# EAGLE board breadboarder_minimizing (EAGLE 6.5.0)
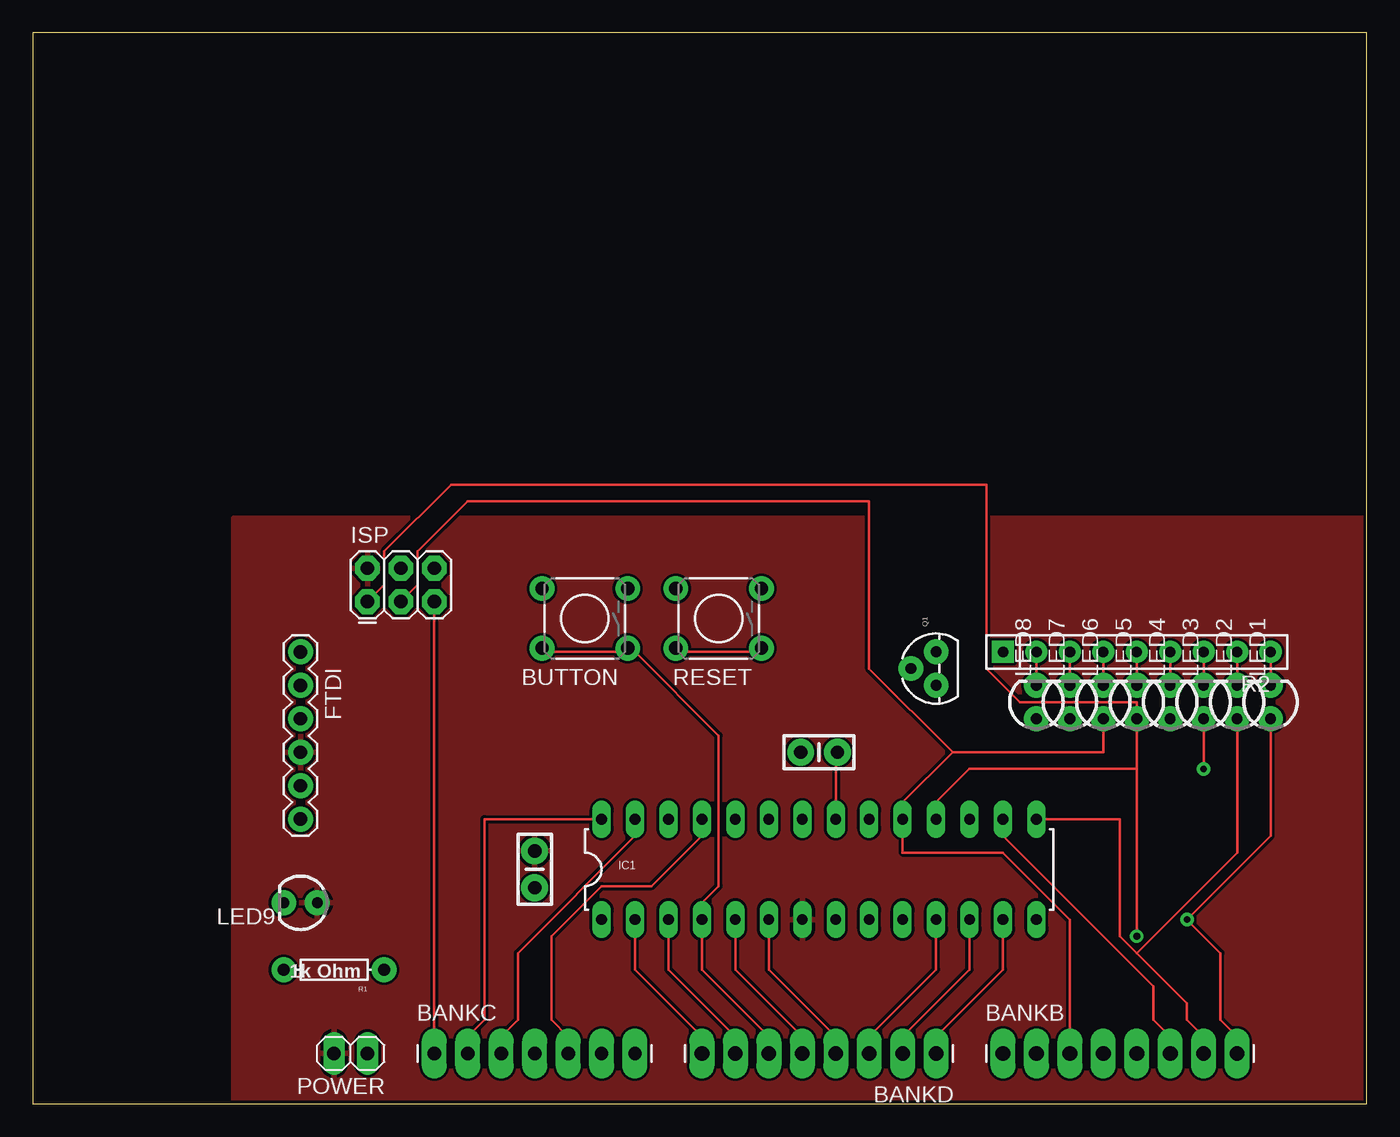
[diagram p0: board, top side]
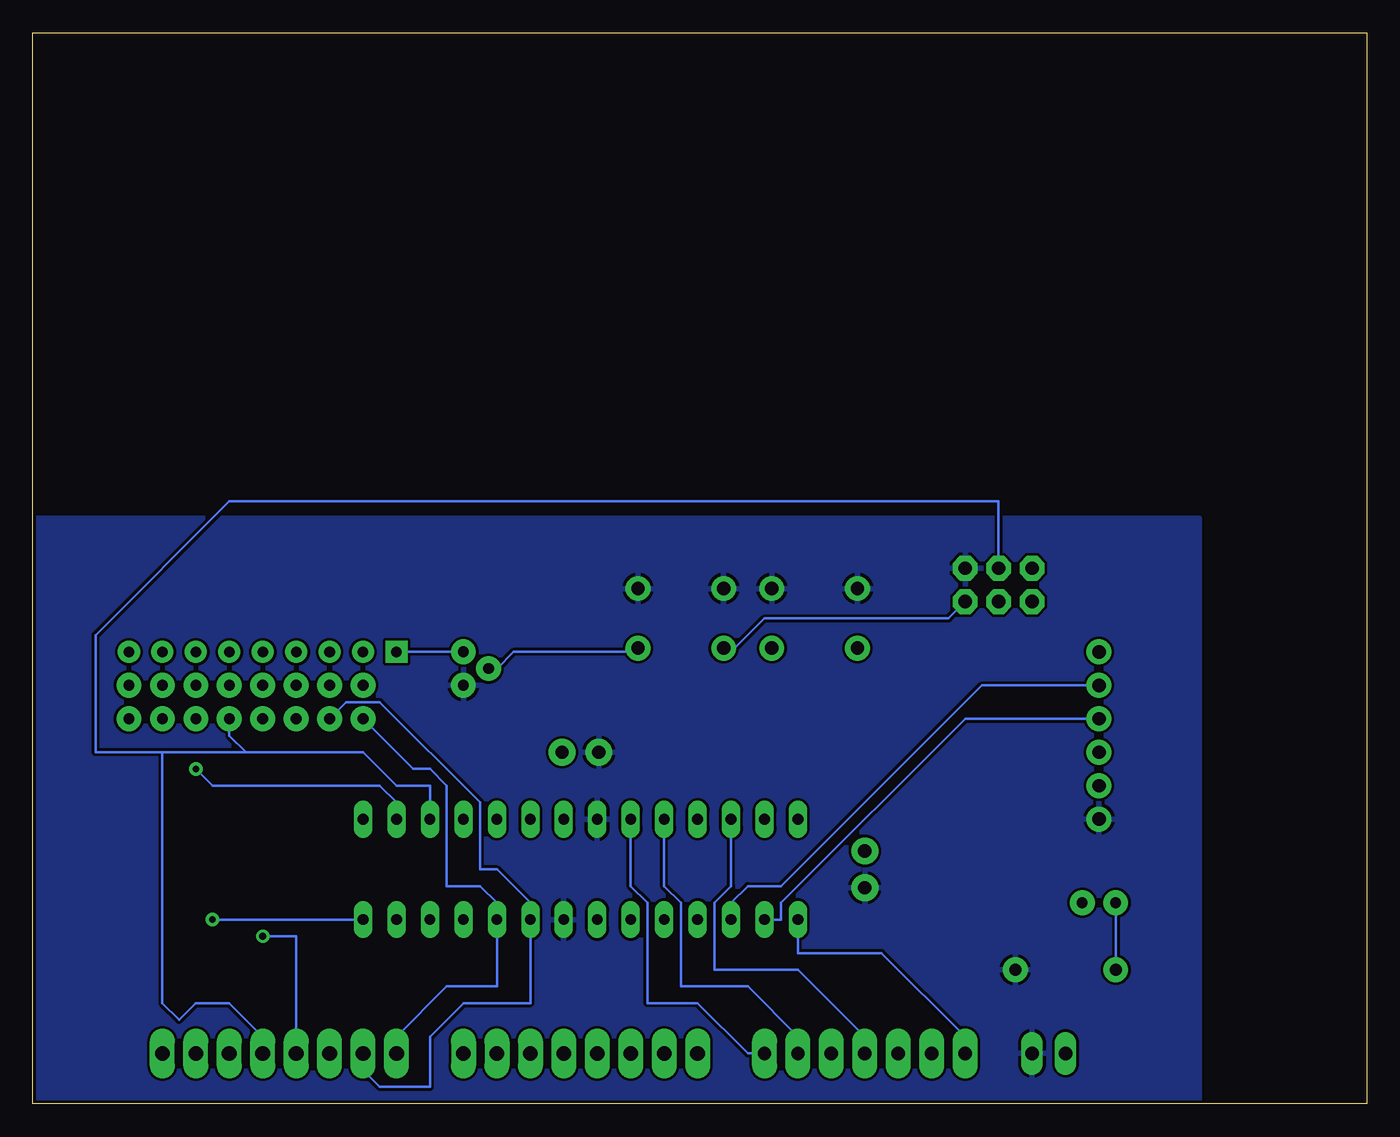
[diagram p1: board, bottom side, seen from below]

Size 101.27 x 81.27 mm. Coordinates in mm from the lower left corner, seen from the top.
Outline: 0,0 101.27,0 101.27,81.27 0,81.27 0,0
Copper layers (1*16): Top 0.035mm / dielectric 1.5mm / Bottom 0.035mm
Design rules "SparkFun": minimum track width 8mil, minimum drill 20mil, track to track 8mil, track to pad 8mil, pad to pad 8mil, via to via 8mil, smd to smd 8mil, copper to edge 10mil, drill to drill 8mil, minimum pad ring 12mil, minimum via ring 10mil, stop-mask expansion 4mil, vias tented up to drill 25mil, thermal gap 10mil

## Footprints (pad centres in the part's own frame; a part is rotated, then mirrored left to right if it is on the bottom)
1X08_LONGPADS = drill 1.118 pad 1.88 long: 1 0,0; 2 2.54,0; 3 5.08,0; 4 7.62,0; 5 10.16,0; 6 12.7,0; 7 15.24,0; 8 17.78,0
1X07_LONGPADS = drill 1.016 pad 1.88 long: 1 0,0; 2 2.54,0; 3 5.08,0; 4 7.62,0; 5 10.16,0; 6 12.7,0; 7 15.24,0
TACTILE-PTH = drill 1.016 pad 1.88: 1 -3.251,2.261; 2 3.251,2.261; 3 -3.251,-2.261; 4 3.251,-2.261
CAP-PTH-SMALL-KIT = drill 1.016 pad 2.032: 1 -1.397,0; 2 1.397,0
FTDI_BASIC = drill 1.016 pad 1.88: CTS 10.16,0; DTR 0,0; GND 12.7,0; RXI 2.54,0; TXO 5.08,0; VCC 7.62,0
DIL28-3 = drill 0.813 long: 1 -16.51,-3.81; 2 -13.97,-3.81; 3 -11.43,-3.81; 4 -8.89,-3.81; 5 -6.35,-3.81; 6 -3.81,-3.81; 7 -1.27,-3.81; 8 1.27,-3.81; 9 3.81,-3.81; 10 6.35,-3.81; 11 8.89,-3.81; 12 11.43,-3.81; 13 13.97,-3.81; 14 16.51,-3.81; 15 16.51,3.81; 16 13.97,3.81; 17 11.43,3.81; 18 8.89,3.81; 19 6.35,3.81; 20 3.81,3.81; 21 1.27,3.81; 22 -1.27,3.81; 23 -3.81,3.81; 24 -6.35,3.81; 25 -8.89,3.81; 26 -11.43,3.81; 27 -13.97,3.81; 28 -16.51,3.81
2X3 = drill 1.016 pad 1.88 octagon: 1 0,0; 2 0,2.54; 3 2.54,0; 4 2.54,2.54; 5 5.08,0; 6 5.08,2.54
LED3MM = drill 0.813 pad 1.88: A -1.27,0; K 1.27,0
1X02 = drill 1.016 long: 1 -1.27,0; 2 1.27,0
TO-92 = drill 0.813 pad 1.88: 1 -1.27,0; 2 0,1.905; 3 1.27,0
AXIAL-0.3 = drill 0.9 pad 1.88: P$1 -3.81,0; P$2 3.81,0
RPACK-SIP-PTH-8-LP = drill 0.8 pad 1.676 square: P$1 0,0 | drill 0.8 pad 1.676: P$2 0,-2.54; P$3 0,-5.08; P$4 0,-7.62; P$5 0,-10.16; P$6 0,-12.7; P$7 0,-15.24; P$8 0,-17.78; P$9 0,-20.32

## Placement (x,y rotation side)
BANKB  [1X08_LONGPADS]  73.66,3.81 0 top
BANKC  [1X07_LONGPADS]  30.48,3.81 0 top
BANKD  [1X08_LONGPADS]  68.58,3.81 180 top
BUTTON  [TACTILE-PTH]  41.91,36.83 180 top
C1  0.1uF  [CAP-PTH-SMALL-KIT]  38.1,17.78 270 top
C2  [CAP-PTH-SMALL-KIT]  59.69,26.67 180 top
FTDI  FTDI_BASICPTH  [FTDI_BASIC]  20.32,34.29 270 top
IC1  AVR-MEGA8-PPTH  [DIL28-3]  59.69,17.78 0 top
ISP  AVR_SPI_PRG_6PTH  [2X3]  25.4,38.1 0 top
LED1  [LED3MM]  93.98,30.48 90 top
LED2  [LED3MM]  91.44,30.48 90 top
LED3  [LED3MM]  88.9,30.48 90 top
LED4  [LED3MM]  86.36,30.48 90 top
LED5  [LED3MM]  83.82,30.48 90 top
LED6  [LED3MM]  81.28,30.48 90 top
LED7  [LED3MM]  78.74,30.48 90 top
LED8  [LED3MM]  76.2,30.48 90 top
LED9  [LED3MM]  20.32,15.24 180 top
POWER  [1X02]  24.13,3.81 180 top
Q1  MOSFET-NCHANNEL2N7000  [TO-92]  68.58,33.02 90 top
R1  1k Ohm  [AXIAL-0.3]  22.86,10.16 180 top
R2  [RPACK-SIP-PTH-8-LP]  73.66,34.29 90 top
RESET  [TACTILE-PTH]  52.07,36.83 180 top

## Library data of the parts
BANKB BANKC BANKD FTDI ISP = SparkFun-Connectors
BUTTON RESET = SparkFun-Electromechanical
C1 C2 = SparkFun-Capacitors
IC1 = SparkFun-DigitalIC
LED1-LED9 = SparkFun-LED
POWER = pinhead
Q1 = SparkFun-DiscreteSemi
R1 = SparkFun-Passives
R2 = SparkFun-Resistors

## Nets
AREF: C2.1 IC1.21
GND: BUTTON.3 BUTTON.4 C1.2 C2.2 FTDI.GND IC1.8 IC1.22 ISP.6 POWER.1 Q1.1 R1.P$1 RESET.3 RESET.4
N$1: Q1.3 R2.P$1
N$2: LED1.K R2.P$9
N$3: LED2.K R2.P$8
N$4: LED3.K R2.P$7
N$5: LED4.K R2.P$6
N$6: LED5.K R2.P$5
N$7: LED6.K R2.P$4
N$8: LED7.K R2.P$3
N$9: LED8.K R2.P$2
N$10: LED9.K R1.P$2
PB0: BANKB.8 IC1.14 LED1.A
PB1: BANKB.7 IC1.15 LED2.A
PB2: BANKB.6 IC1.16 LED3.A
PB3: BANKB.5 IC1.17 ISP.4 LED4.A
PB4: BANKB.4 IC1.18 ISP.1 LED5.A
PB5: BANKB.3 IC1.19 ISP.3 LED6.A
PB6: BANKB.2 IC1.9 LED7.A
PB7: BANKB.1 IC1.10 LED8.A
PC0: BANKC.7 IC1.23
PC1: BANKC.6 IC1.24
PC2: BANKC.5 IC1.25
PC3: BANKC.4 IC1.26
PC4: BANKC.3 IC1.27
PC5: BANKC.2 IC1.28
PD0: BANKD.8 FTDI.TXO IC1.2
PD1: BANKD.7 FTDI.RXI IC1.3
PD2: BANKD.6 BUTTON.1 BUTTON.2 IC1.4
PD3: BANKD.5 IC1.5
PD4: BANKD.4 IC1.6
PD5: BANKD.3 IC1.11
PD6: BANKD.2 IC1.12
PD7: BANKD.1 IC1.13
RESET: BANKC.1 IC1.1 ISP.5 Q1.2 RESET.1 RESET.2
VCC: C1.1 FTDI.VCC IC1.7 ISP.2 LED9.A POWER.2

## Tracks (layer width: path | path; a pad name or v marks a point on that pad's centre or on a via)
AREF
  Top 0.203: IC1.21 60.96,26.67 C2.1
GND
  pour Bottom: 13.97,44.45 12.7,44.45 12.7,-1.27 104.14,-1.27 104.14,44.45
N$1
  Bottom 0.203: Q1.3 R2.P$1
N$2
  Top 0.203: LED1.K R2.P$9
N$3
  Top 0.203: LED2.K R2.P$8
N$4
  Top 0.203: LED3.K R2.P$7
N$5
  Top 0.203: LED4.K R2.P$6
N$6
  Top 0.203: LED5.K R2.P$5
N$7
  Top 0.203: LED6.K R2.P$4
N$8
  Top 0.203: LED7.K R2.P$3
N$9
  Top 0.203: LED8.K R2.P$2
N$10
  Bottom 0.203: LED9.K R1.P$2
PB0  (via drill 0.51)
  Top 0.203: BANKB.8 91.44,5.08 90.17,6.35 90.17,11.43 v87.63,13.97 93.98,20.32 LED1.A
  Bottom 0.203: v87.63,13.97 IC1.14
PB1
  Top 0.203: IC1.15 82.55,21.59 82.55,12.7 83.82,11.43 | 83.82,11.43 87.63,7.62 87.63,6.35 88.9,5.08 BANKB.7 | LED2.A 91.44,19.05 83.82,11.43
PB2  (via drill 0.51)
  Top 0.203: IC1.16 73.66,20.32 85.09,8.89 85.09,6.35 86.36,5.08 BANKB.6 | v88.9,25.4 LED3.A
  Bottom 0.203: v88.9,25.4 87.63,24.13 74.93,24.13 73.66,22.86 IC1.16
PB3
  Bottom 0.203: IC1.17 71.12,24.13 73.66,24.13 76.2,26.67 85.09,26.67 | 85.09,26.67 86.36,27.94 LED4.A | ISP.4 27.94,45.72 86.36,45.72 96.52,35.56 96.52,26.67 91.44,26.67 | 85.09,26.67 91.44,26.67 | BANKB.5 83.82,5.08 86.36,7.62 88.9,7.62 90.17,6.35 91.44,7.62 91.44,26.67
PB4  (via drill 0.51)
  Top 0.203: IC1.18 68.58,22.86 71.12,25.4 83.82,25.4 | 83.82,25.4 LED5.A 83.82,30.48 74.93,30.48 72.39,33.02 72.39,46.99 31.75,46.99 26.67,41.91 26.67,39.37 ISP.1 | 83.82,25.4 v83.82,12.7
  Bottom 0.203: BANKB.4 81.28,12.7 v83.82,12.7
PB5
  Top 0.203: 69.85,26.67 66.04,22.86 IC1.19 66.04,19.05 73.66,19.05 78.74,13.97 BANKB.3 | 69.85,26.67 81.28,26.67 LED6.A | ISP.3 29.21,39.37 29.21,41.91 33.02,45.72 63.5,45.72 63.5,33.02 69.85,26.67
PB6
  Bottom 0.203: BANKB.2 76.2,2.54 74.93,1.27 71.12,1.27 71.12,5.08 68.58,7.62 63.5,7.62 IC1.9 63.5,15.24 66.04,17.78 67.31,17.78 67.31,22.86 74.93,30.48 77.47,30.48 LED7.A
PB7
  Bottom 0.203: BANKB.1 73.66,5.08 69.85,8.89 66.04,8.89 IC1.10 66.04,15.24 67.31,16.51 69.85,16.51 69.85,24.13 71.12,25.4 72.39,25.4 LED8.A
PC0
  Bottom 0.203: IC1.23 55.88,16.51 54.61,15.24 54.61,7.62 50.8,7.62 46.99,3.81 BANKC.7
PC1
  Bottom 0.203: IC1.24 53.34,16.51 52.07,15.24 52.07,8.89 46.99,8.89 43.18,5.08 BANKC.6
PC2
  Top 0.203: IC1.25 50.8,20.32 46.99,16.51 43.18,16.51 39.37,12.7 39.37,6.35 40.64,5.08 BANKC.5
PC3
  Bottom 0.203: IC1.26 48.26,16.51 49.53,15.24 49.53,10.16 43.18,10.16 38.1,5.08 BANKC.4
PC4
  Top 0.203: IC1.27 45.72,20.32 36.83,11.43 36.83,6.35 35.56,5.08 BANKC.3
PC5
  Top 0.203: IC1.28 34.29,21.59 34.29,6.35 33.02,5.08 BANKC.2
PD0
  Top 0.203: IC1.2 45.72,10.16 50.8,5.08 BANKD.8
  Bottom 0.203: FTDI.TXO 30.48,29.21 44.45,15.24 44.45,13.97 IC1.2
PD1
  Top 0.203: IC1.3 48.26,10.16 53.34,5.08 BANKD.7
  Bottom 0.203: FTDI.RXI 29.21,31.75 44.45,16.51 46.99,16.51 48.26,15.24 IC1.3
PD2
  Top 0.203: BUTTON.2 39.37,34.29 44.45,34.29 BUTTON.1 45.72,34.29 52.07,27.94 52.07,16.51 50.8,15.24 IC1.4 50.8,10.16 55.88,5.08 BANKD.6
PD3
  Top 0.203: IC1.5 53.34,10.16 58.42,5.08 BANKD.5
PD4
  Top 0.203: IC1.6 55.88,10.16 60.96,5.08 BANKD.4
PD5
  Top 0.203: IC1.11 68.58,10.16 63.5,5.08 BANKD.3
PD6
  Top 0.203: IC1.12 71.12,10.16 66.04,5.08 BANKD.2
PD7
  Top 0.203: IC1.13 73.66,10.16 68.58,5.08 BANKD.1
RESET
  Top 0.203: RESET.1 54.61,34.29 49.53,34.29 RESET.2 | ISP.5 BANKC.1
  Bottom 0.203: IC1.1 43.18,11.43 36.83,11.43 30.48,5.08 BANKC.1 | ISP.5 31.75,36.83 45.72,36.83 48.26,34.29 RESET.2 | Q1.2 66.04,33.02 64.77,34.29 55.88,34.29 RESET.1
VCC
  pour Top: 15.24,44.45 15.24,0 100.33,0 101.6,0 101.6,44.45